# EAGLE board sot23-6 (EAGLE 5.06)
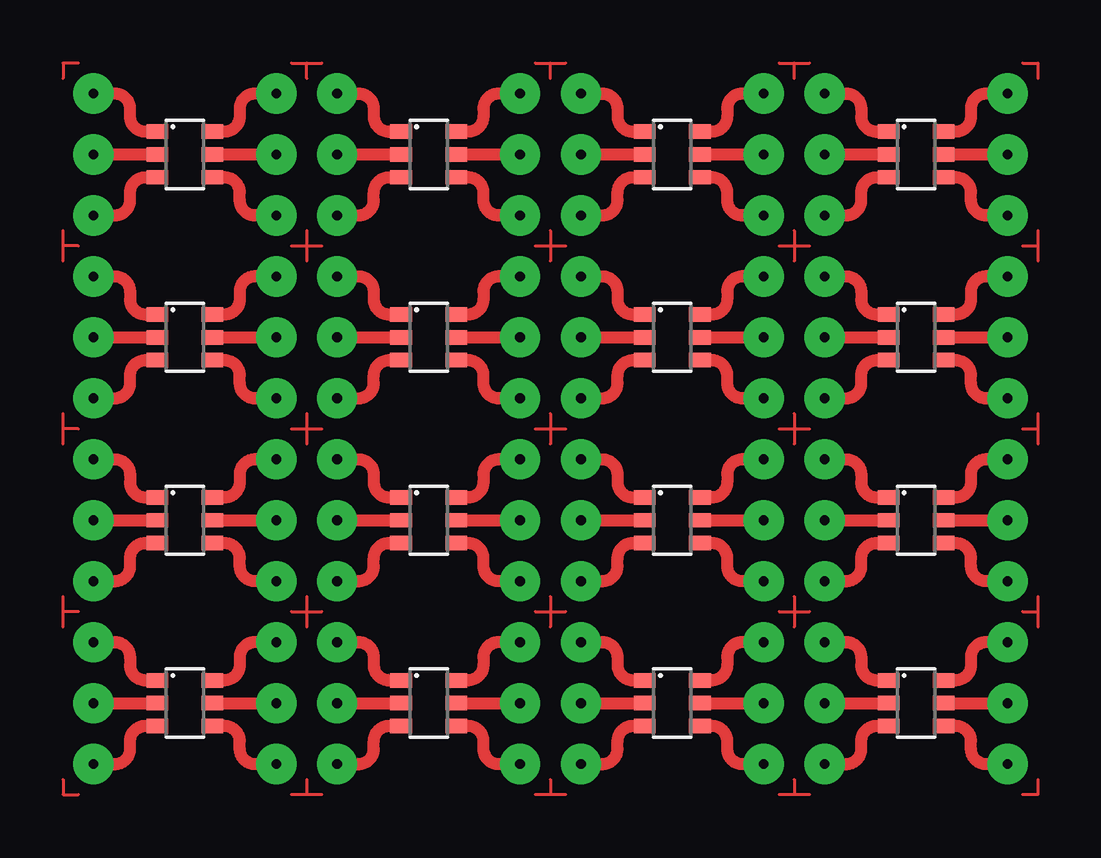
[diagram p0: board, top side]

No outline drawn. Coordinates in mm, seen from the top.
Copper layers (1*16): Top 0.035mm / dielectric 1.5mm / Bottom 0.035mm
Design rules "default": minimum track width 10mil, minimum drill 24mil, track to track 8mil, track to pad 8mil, pad to pad 8mil, via to via 8mil, smd to smd 8mil, copper to edge 40mil, drill to drill 8mil, minimum pad ring 10mil, minimum via ring 8mil, stop-mask expansion 4mil, vias tented up to drill 0mil, thermal gap 10mil

## Footprints (pad centres in the part's own frame; a part is rotated, then mirrored left to right if it is on the bottom)
SOT23-6 = smd 0.6 x 0.9: 1 -0.95,-1.15; 2 0,-1.15; 3 0.95,-1.15; 4 0.95,1.15; 5 0,1.15; 6 -0.95,1.15

## Placement (x,y rotation side)
E$1  [SOT23-6]  0,0 270 top
E$2  [SOT23-6]  10.16,0 270 top
E$3  [SOT23-6]  20.32,0 270 top
E$4  [SOT23-6]  30.48,0 270 top
E$5  [SOT23-6]  0,-7.62 270 top
E$6  [SOT23-6]  10.16,-7.62 270 top
E$7  [SOT23-6]  20.32,-7.62 270 top
E$8  [SOT23-6]  30.48,-7.62 270 top
E$9  [SOT23-6]  0,-15.24 270 top
E$10  [SOT23-6]  10.16,-15.24 270 top
E$11  [SOT23-6]  20.32,-15.24 270 top
E$12  [SOT23-6]  30.48,-15.24 270 top
E$13  [SOT23-6]  0,-22.86 270 top
E$14  [SOT23-6]  10.16,-22.86 270 top
E$15  [SOT23-6]  20.32,-22.86 270 top
E$16  [SOT23-6]  30.48,-22.86 270 top

## Library data of the parts
E$1-E$16 = linear

## Tracks (layer width: path | path; a pad name or v marks a point on that pad's centre or on a via)
S$1  (via drill 0.41 pad 1.68)
  Top 0.508: v-3.81,2.54 -2.92,2.54 arc-90 -2.29,1.91 -2.29,1.59 arc90 -1.65,0.95 -1.27,0.95
S$2  (via drill 0.41 pad 1.68)
  Top 0.508: v-3.81,0 -1.27,0
S$3  (via drill 0.41 pad 1.68)
  Top 0.508: v-3.81,-2.54 -2.92,-2.54 arc90 -2.29,-1.91 -2.29,-1.59 arc-90 -1.65,-0.95 -1.27,-0.95
S$4  (via drill 0.41 pad 1.68)
  Top 0.508: v3.81,-2.54 2.92,-2.54 arc-90 2.29,-1.91 2.29,-1.59 arc90 1.65,-0.95 1.27,-0.95
S$5  (via drill 0.41 pad 1.68)
  Top 0.508: 1.27,0 v3.81,0
S$6  (via drill 0.41 pad 1.68)
  Top 0.508: v3.81,2.54 2.92,2.54 arc90 2.29,1.91 2.29,1.59 arc-90 1.65,0.95 1.27,0.95
S$7  (via drill 0.41 pad 1.68)
  Top 0.508: v6.35,2.54 7.24,2.54 arc-90 7.87,1.91 7.87,1.59 arc90 8.51,0.95 8.89,0.95
S$8  (via drill 0.41 pad 1.68)
  Top 0.508: v6.35,0 8.89,0
S$9  (via drill 0.41 pad 1.68)
  Top 0.508: v6.35,-2.54 7.24,-2.54 arc90 7.87,-1.91 7.87,-1.59 arc-90 8.51,-0.95 8.89,-0.95
S$10  (via drill 0.41 pad 1.68)
  Top 0.508: v13.97,-2.54 13.08,-2.54 arc-90 12.45,-1.91 12.45,-1.59 arc90 11.81,-0.95 11.43,-0.95
S$11  (via drill 0.41 pad 1.68)
  Top 0.508: 11.43,0 v13.97,0
S$12  (via drill 0.41 pad 1.68)
  Top 0.508: v13.97,2.54 13.08,2.54 arc90 12.45,1.91 12.45,1.59 arc-90 11.81,0.95 11.43,0.95
S$13
  Top 0.508: 16.51,2.54 17.4,2.54 arc-90 18.03,1.91 18.03,1.59 arc90 18.67,0.95 19.05,0.95
S$14
  Top 0.508: 16.51,0 19.05,0
S$15
  Top 0.508: 16.51,-2.54 17.4,-2.54 arc90 18.03,-1.91 18.03,-1.59 arc-90 18.67,-0.95 19.05,-0.95
S$16
  Top 0.508: 24.13,-2.54 23.24,-2.54 arc-90 22.61,-1.91 22.61,-1.59 arc90 21.97,-0.95 21.59,-0.95
S$17
  Top 0.508: 21.59,0 24.13,0
S$18
  Top 0.508: 24.13,2.54 23.24,2.54 arc90 22.61,1.91 22.61,1.59 arc-90 21.97,0.95 21.59,0.95
S$19
  Top 0.508: 26.67,2.54 27.56,2.54 arc-90 28.19,1.91 28.19,1.59 arc90 28.83,0.95 29.21,0.95
S$20
  Top 0.508: 26.67,0 29.21,0
S$21
  Top 0.508: 26.67,-2.54 27.56,-2.54 arc90 28.19,-1.91 28.19,-1.59 arc-90 28.83,-0.95 29.21,-0.95
S$22
  Top 0.508: 34.29,-2.54 33.4,-2.54 arc-90 32.77,-1.91 32.77,-1.59 arc90 32.13,-0.95 31.75,-0.95
S$23
  Top 0.508: 31.75,0 34.29,0
S$24
  Top 0.508: 34.29,2.54 33.4,2.54 arc90 32.77,1.91 32.77,1.59 arc-90 32.13,0.95 31.75,0.95
S$25
  Top 0.508: -3.81,-5.08 -2.92,-5.08 arc-90 -2.29,-5.71 -2.29,-6.03 arc90 -1.65,-6.67 -1.27,-6.67
S$26
  Top 0.508: -3.81,-7.62 -1.27,-7.62
S$27
  Top 0.508: -3.81,-10.16 -2.92,-10.16 arc90 -2.29,-9.53 -2.29,-9.21 arc-90 -1.65,-8.57 -1.27,-8.57
S$28
  Top 0.508: 3.81,-10.16 2.92,-10.16 arc-90 2.29,-9.53 2.29,-9.21 arc90 1.65,-8.57 1.27,-8.57
S$29
  Top 0.508: 1.27,-7.62 3.81,-7.62
S$30
  Top 0.508: 3.81,-5.08 2.92,-5.08 arc90 2.29,-5.71 2.29,-6.03 arc-90 1.65,-6.67 1.27,-6.67
S$31
  Top 0.508: 6.35,-5.08 7.24,-5.08 arc-90 7.87,-5.71 7.87,-6.03 arc90 8.51,-6.67 8.89,-6.67
S$32
  Top 0.508: 6.35,-7.62 8.89,-7.62
S$33
  Top 0.508: 6.35,-10.16 7.24,-10.16 arc90 7.87,-9.53 7.87,-9.21 arc-90 8.51,-8.57 8.89,-8.57
S$34
  Top 0.508: 13.97,-10.16 13.08,-10.16 arc-90 12.45,-9.53 12.45,-9.21 arc90 11.81,-8.57 11.43,-8.57
S$35
  Top 0.508: 11.43,-7.62 13.97,-7.62
S$36
  Top 0.508: 13.97,-5.08 13.08,-5.08 arc90 12.45,-5.71 12.45,-6.03 arc-90 11.81,-6.67 11.43,-6.67
S$37
  Top 0.508: 16.51,-5.08 17.4,-5.08 arc-90 18.03,-5.71 18.03,-6.03 arc90 18.67,-6.67 19.05,-6.67
S$38
  Top 0.508: 16.51,-7.62 19.05,-7.62
S$39
  Top 0.508: 16.51,-10.16 17.4,-10.16 arc90 18.03,-9.53 18.03,-9.21 arc-90 18.67,-8.57 19.05,-8.57
S$40
  Top 0.508: 24.13,-10.16 23.24,-10.16 arc-90 22.61,-9.53 22.61,-9.21 arc90 21.97,-8.57 21.59,-8.57
S$41
  Top 0.508: 21.59,-7.62 24.13,-7.62
S$42
  Top 0.508: 24.13,-5.08 23.24,-5.08 arc90 22.61,-5.71 22.61,-6.03 arc-90 21.97,-6.67 21.59,-6.67
S$43
  Top 0.508: 26.67,-5.08 27.56,-5.08 arc-90 28.19,-5.71 28.19,-6.03 arc90 28.83,-6.67 29.21,-6.67
S$44
  Top 0.508: 26.67,-7.62 29.21,-7.62
S$45
  Top 0.508: 26.67,-10.16 27.56,-10.16 arc90 28.19,-9.53 28.19,-9.21 arc-90 28.83,-8.57 29.21,-8.57
S$46
  Top 0.508: 34.29,-10.16 33.4,-10.16 arc-90 32.77,-9.53 32.77,-9.21 arc90 32.13,-8.57 31.75,-8.57
S$47
  Top 0.508: 31.75,-7.62 34.29,-7.62
S$48
  Top 0.508: 34.29,-5.08 33.4,-5.08 arc90 32.77,-5.71 32.77,-6.03 arc-90 32.13,-6.67 31.75,-6.67
S$49
  Top 0.508: -3.81,-12.7 -2.92,-12.7 arc-90 -2.29,-13.34 -2.29,-13.65 arc90 -1.65,-14.29 -1.27,-14.29
S$50
  Top 0.508: -3.81,-15.24 -1.27,-15.24
S$51
  Top 0.508: -3.81,-17.78 -2.92,-17.78 arc90 -2.29,-17.14 -2.29,-16.83 arc-90 -1.65,-16.19 -1.27,-16.19
S$52
  Top 0.508: 3.81,-17.78 2.92,-17.78 arc-90 2.29,-17.14 2.29,-16.83 arc90 1.65,-16.19 1.27,-16.19
S$53
  Top 0.508: 1.27,-15.24 3.81,-15.24
S$54
  Top 0.508: 3.81,-12.7 2.92,-12.7 arc90 2.29,-13.34 2.29,-13.65 arc-90 1.65,-14.29 1.27,-14.29
S$55
  Top 0.508: 6.35,-12.7 7.24,-12.7 arc-90 7.87,-13.34 7.87,-13.65 arc90 8.51,-14.29 8.89,-14.29
S$56
  Top 0.508: 6.35,-15.24 8.89,-15.24
S$57
  Top 0.508: 6.35,-17.78 7.24,-17.78 arc90 7.87,-17.14 7.87,-16.83 arc-90 8.51,-16.19 8.89,-16.19
S$58
  Top 0.508: 13.97,-17.78 13.08,-17.78 arc-90 12.45,-17.14 12.45,-16.83 arc90 11.81,-16.19 11.43,-16.19
S$59
  Top 0.508: 11.43,-15.24 13.97,-15.24
S$60
  Top 0.508: 13.97,-12.7 13.08,-12.7 arc90 12.45,-13.34 12.45,-13.65 arc-90 11.81,-14.29 11.43,-14.29
S$61
  Top 0.508: 16.51,-12.7 17.4,-12.7 arc-90 18.03,-13.34 18.03,-13.65 arc90 18.67,-14.29 19.05,-14.29
S$62
  Top 0.508: 16.51,-15.24 19.05,-15.24
S$63
  Top 0.508: 16.51,-17.78 17.4,-17.78 arc90 18.03,-17.14 18.03,-16.83 arc-90 18.67,-16.19 19.05,-16.19
S$64
  Top 0.508: 24.13,-17.78 23.24,-17.78 arc-90 22.61,-17.14 22.61,-16.83 arc90 21.97,-16.19 21.59,-16.19
S$65
  Top 0.508: 21.59,-15.24 24.13,-15.24
S$66
  Top 0.508: 24.13,-12.7 23.24,-12.7 arc90 22.61,-13.34 22.61,-13.65 arc-90 21.97,-14.29 21.59,-14.29
S$67
  Top 0.508: 26.67,-12.7 27.56,-12.7 arc-90 28.19,-13.34 28.19,-13.65 arc90 28.83,-14.29 29.21,-14.29
S$68
  Top 0.508: 26.67,-15.24 29.21,-15.24
S$69
  Top 0.508: 26.67,-17.78 27.56,-17.78 arc90 28.19,-17.14 28.19,-16.83 arc-90 28.83,-16.19 29.21,-16.19
S$70
  Top 0.508: 34.29,-17.78 33.4,-17.78 arc-90 32.77,-17.14 32.77,-16.83 arc90 32.13,-16.19 31.75,-16.19
S$71
  Top 0.508: 31.75,-15.24 34.29,-15.24
S$72
  Top 0.508: 34.29,-12.7 33.4,-12.7 arc90 32.77,-13.34 32.77,-13.65 arc-90 32.13,-14.29 31.75,-14.29
S$73
  Top 0.508: -3.81,-20.32 -2.92,-20.32 arc-90 -2.29,-20.95 -2.29,-21.27 arc90 -1.65,-21.91 -1.27,-21.91
S$74
  Top 0.508: -3.81,-22.86 -1.27,-22.86
S$75
  Top 0.508: -3.81,-25.4 -2.92,-25.4 arc90 -2.29,-24.77 -2.29,-24.45 arc-90 -1.65,-23.81 -1.27,-23.81
S$76
  Top 0.508: 3.81,-25.4 2.92,-25.4 arc-90 2.29,-24.77 2.29,-24.45 arc90 1.65,-23.81 1.27,-23.81
S$77
  Top 0.508: 1.27,-22.86 3.81,-22.86
S$78
  Top 0.508: 3.81,-20.32 2.92,-20.32 arc90 2.29,-20.95 2.29,-21.27 arc-90 1.65,-21.91 1.27,-21.91
S$79
  Top 0.508: 6.35,-20.32 7.24,-20.32 arc-90 7.87,-20.95 7.87,-21.27 arc90 8.51,-21.91 8.89,-21.91
S$80
  Top 0.508: 6.35,-22.86 8.89,-22.86
S$81
  Top 0.508: 6.35,-25.4 7.24,-25.4 arc90 7.87,-24.77 7.87,-24.45 arc-90 8.51,-23.81 8.89,-23.81
S$82
  Top 0.508: 13.97,-25.4 13.08,-25.4 arc-90 12.45,-24.77 12.45,-24.45 arc90 11.81,-23.81 11.43,-23.81
S$83
  Top 0.508: 11.43,-22.86 13.97,-22.86
S$84
  Top 0.508: 13.97,-20.32 13.08,-20.32 arc90 12.45,-20.95 12.45,-21.27 arc-90 11.81,-21.91 11.43,-21.91
S$85
  Top 0.508: 16.51,-20.32 17.4,-20.32 arc-90 18.03,-20.95 18.03,-21.27 arc90 18.67,-21.91 19.05,-21.91
S$86
  Top 0.508: 16.51,-22.86 19.05,-22.86
S$87
  Top 0.508: 16.51,-25.4 17.4,-25.4 arc90 18.03,-24.77 18.03,-24.45 arc-90 18.67,-23.81 19.05,-23.81
S$88
  Top 0.508: 24.13,-25.4 23.24,-25.4 arc-90 22.61,-24.77 22.61,-24.45 arc90 21.97,-23.81 21.59,-23.81
S$89
  Top 0.508: 21.59,-22.86 24.13,-22.86
S$90
  Top 0.508: 24.13,-20.32 23.24,-20.32 arc90 22.61,-20.95 22.61,-21.27 arc-90 21.97,-21.91 21.59,-21.91
S$91
  Top 0.508: 26.67,-20.32 27.56,-20.32 arc-90 28.19,-20.95 28.19,-21.27 arc90 28.83,-21.91 29.21,-21.91
S$92
  Top 0.508: 26.67,-22.86 29.21,-22.86
S$93
  Top 0.508: 26.67,-25.4 27.56,-25.4 arc90 28.19,-24.77 28.19,-24.45 arc-90 28.83,-23.81 29.21,-23.81
S$94
  Top 0.508: 34.29,-25.4 33.4,-25.4 arc-90 32.77,-24.77 32.77,-24.45 arc90 32.13,-23.81 31.75,-23.81
S$95
  Top 0.508: 31.75,-22.86 34.29,-22.86
S$96
  Top 0.508: 34.29,-20.32 33.4,-20.32 arc90 32.77,-20.95 32.77,-21.27 arc-90 32.13,-21.91 31.75,-21.91
S$97
  Top 0.127: 4.45,3.81 5.08,3.81 | 5.08,3.81 5.71,3.81 | 5.08,3.17 5.08,3.81
S$98
  Top 0.127: 14.61,3.81 15.24,3.81 | 15.24,3.81 15.88,3.81 | 15.24,3.17 15.24,3.81
S$99
  Top 0.127: 24.77,3.81 25.4,3.81 | 25.4,3.81 26.04,3.81 | 25.4,3.17 25.4,3.81
S$100
  Top 0.127: 26.04,-26.67 25.4,-26.67 | 25.4,-26.67 24.77,-26.67 | 25.4,-26.04 25.4,-26.67
S$101
  Top 0.127: 15.88,-26.67 15.24,-26.67 | 15.24,-26.67 14.61,-26.67 | 15.24,-26.04 15.24,-26.67
S$102
  Top 0.127: 5.71,-26.67 5.08,-26.67 | 5.08,-26.67 4.45,-26.67 | 5.08,-26.04 5.08,-26.67
S$103
  Top 0.127: -5.08,-19.68 -5.08,-19.05 | -5.08,-19.05 -5.08,-18.41 | -4.45,-19.05 -5.08,-19.05
S$104
  Top 0.127: -5.08,-12.06 -5.08,-11.43 | -5.08,-11.43 -5.08,-10.79 | -4.45,-11.43 -5.08,-11.43
S$105
  Top 0.127: -5.08,-4.45 -5.08,-3.81 | -5.08,-3.81 -5.08,-3.17 | -4.45,-3.81 -5.08,-3.81
S$106
  Top 0.127: 35.56,-3.17 35.56,-3.81 | 35.56,-3.81 35.56,-4.45 | 34.92,-3.81 35.56,-3.81
S$107
  Top 0.127: 35.56,-10.79 35.56,-11.43 | 35.56,-11.43 35.56,-12.06 | 34.92,-11.43 35.56,-11.43
S$108
  Top 0.127: 35.56,-18.41 35.56,-19.05 | 35.56,-19.05 35.56,-19.68 | 34.92,-19.05 35.56,-19.05
S$109
  Top 0.127: -4.45,3.81 -5.08,3.81 -5.08,3.17
S$110
  Top 0.127: 34.92,3.81 35.56,3.81 35.56,3.17
S$111
  Top 0.127: 35.56,-26.04 35.56,-26.67 34.92,-26.67
S$112
  Top 0.127: -5.08,-26.04 -5.08,-26.67 -4.45,-26.67
S$113
  Top 0.127: 5.08,-18.41 5.08,-19.68
S$114
  Top 0.127: 4.45,-19.05 5.71,-19.05
S$115
  Top 0.127: 14.61,-19.05 15.88,-19.05
S$116
  Top 0.127: 15.24,-18.41 15.24,-19.68
S$117
  Top 0.127: 24.77,-19.05 26.04,-19.05
S$118
  Top 0.127: 25.4,-18.41 25.4,-19.68
S$119
  Top 0.127: 5.08,-10.79 5.08,-12.06
S$120
  Top 0.127: 4.45,-11.43 5.71,-11.43
S$121
  Top 0.127: 14.61,-11.43 15.88,-11.43
S$122
  Top 0.127: 15.24,-10.79 15.24,-12.06
S$123
  Top 0.127: 24.77,-11.43 26.04,-11.43
S$124
  Top 0.127: 25.4,-10.79 25.4,-12.06
S$125
  Top 0.127: 5.08,-3.17 5.08,-4.45
S$126
  Top 0.127: 4.45,-3.81 5.71,-3.81
S$127
  Top 0.127: 14.61,-3.81 15.88,-3.81
S$128
  Top 0.127: 15.24,-3.17 15.24,-4.45
S$129
  Top 0.127: 24.77,-3.81 26.04,-3.81
S$130
  Top 0.127: 25.4,-3.17 25.4,-4.45
S$132  (via drill 0.41 pad 1.68)
  other vias: 16.51,2.54
S$133  (via drill 0.41 pad 1.68)
  other vias: 16.51,0
S$134  (via drill 0.41 pad 1.68)
  other vias: 16.51,-2.54
S$135  (via drill 0.41 pad 1.68)
  other vias: 24.13,-2.54
S$136  (via drill 0.41 pad 1.68)
  other vias: 24.13,0
S$137  (via drill 0.41 pad 1.68)
  other vias: 24.13,2.54
S$138  (via drill 0.41 pad 1.68)
  other vias: 26.67,2.54
S$139  (via drill 0.41 pad 1.68)
  other vias: 26.67,0
S$140  (via drill 0.41 pad 1.68)
  other vias: 26.67,-2.54
S$141  (via drill 0.41 pad 1.68)
  other vias: 34.29,-2.54
S$142  (via drill 0.41 pad 1.68)
  other vias: 34.29,0
S$143  (via drill 0.41 pad 1.68)
  other vias: 34.29,2.54
S$144  (via drill 0.41 pad 1.68)
  other vias: -3.81,-5.08
S$145  (via drill 0.41 pad 1.68)
  other vias: -3.81,-7.62
S$146  (via drill 0.41 pad 1.68)
  other vias: -3.81,-10.16
S$147  (via drill 0.41 pad 1.68)
  other vias: 3.81,-10.16
S$148  (via drill 0.41 pad 1.68)
  other vias: 3.81,-7.62
S$149  (via drill 0.41 pad 1.68)
  other vias: 3.81,-5.08
S$150  (via drill 0.41 pad 1.68)
  other vias: 6.35,-5.08
S$151  (via drill 0.41 pad 1.68)
  other vias: 6.35,-7.62
S$152  (via drill 0.41 pad 1.68)
  other vias: 6.35,-10.16
S$153  (via drill 0.41 pad 1.68)
  other vias: 13.97,-10.16
S$154  (via drill 0.41 pad 1.68)
  other vias: 13.97,-7.62
S$155  (via drill 0.41 pad 1.68)
  other vias: 13.97,-5.08
S$156  (via drill 0.41 pad 1.68)
  other vias: 16.51,-5.08
S$157  (via drill 0.41 pad 1.68)
  other vias: 16.51,-7.62
S$158  (via drill 0.41 pad 1.68)
  other vias: 16.51,-10.16
S$159  (via drill 0.41 pad 1.68)
  other vias: 24.13,-10.16
S$160  (via drill 0.41 pad 1.68)
  other vias: 24.13,-7.62
S$161  (via drill 0.41 pad 1.68)
  other vias: 24.13,-5.08
S$162  (via drill 0.41 pad 1.68)
  other vias: 26.67,-5.08
S$163  (via drill 0.41 pad 1.68)
  other vias: 26.67,-7.62
S$164  (via drill 0.41 pad 1.68)
  other vias: 26.67,-10.16
S$165  (via drill 0.41 pad 1.68)
  other vias: 34.29,-10.16
S$166  (via drill 0.41 pad 1.68)
  other vias: 34.29,-7.62
S$167  (via drill 0.41 pad 1.68)
  other vias: 34.29,-5.08
S$168  (via drill 0.41 pad 1.68)
  other vias: -3.81,-12.7
S$169  (via drill 0.41 pad 1.68)
  other vias: -3.81,-15.24
S$170  (via drill 0.41 pad 1.68)
  other vias: -3.81,-17.78
S$171  (via drill 0.41 pad 1.68)
  other vias: 3.81,-17.78
S$172  (via drill 0.41 pad 1.68)
  other vias: 3.81,-15.24
S$173  (via drill 0.41 pad 1.68)
  other vias: 3.81,-12.7
S$174  (via drill 0.41 pad 1.68)
  other vias: 6.35,-12.7
S$175  (via drill 0.41 pad 1.68)
  other vias: 6.35,-15.24
S$176  (via drill 0.41 pad 1.68)
  other vias: 6.35,-17.78
S$177  (via drill 0.41 pad 1.68)
  other vias: 13.97,-17.78
S$178  (via drill 0.41 pad 1.68)
  other vias: 13.97,-15.24
S$179  (via drill 0.41 pad 1.68)
  other vias: 13.97,-12.7
S$180  (via drill 0.41 pad 1.68)
  other vias: 16.51,-12.7
S$181  (via drill 0.41 pad 1.68)
  other vias: 16.51,-15.24
S$182  (via drill 0.41 pad 1.68)
  other vias: 16.51,-17.78
S$183  (via drill 0.41 pad 1.68)
  other vias: 24.13,-17.78
S$184  (via drill 0.41 pad 1.68)
  other vias: 24.13,-15.24
S$185  (via drill 0.41 pad 1.68)
  other vias: 24.13,-12.7
S$186  (via drill 0.41 pad 1.68)
  other vias: 26.67,-12.7
S$187  (via drill 0.41 pad 1.68)
  other vias: 26.67,-15.24
S$188  (via drill 0.41 pad 1.68)
  other vias: 26.67,-17.78
S$189  (via drill 0.41 pad 1.68)
  other vias: 34.29,-17.78
S$190  (via drill 0.41 pad 1.68)
  other vias: 34.29,-15.24
S$191  (via drill 0.41 pad 1.68)
  other vias: 34.29,-12.7
S$192  (via drill 0.41 pad 1.68)
  other vias: -3.81,-20.32
S$193  (via drill 0.41 pad 1.68)
  other vias: -3.81,-22.86
S$194  (via drill 0.41 pad 1.68)
  other vias: -3.81,-25.4
S$195  (via drill 0.41 pad 1.68)
  other vias: 3.81,-25.4
S$196  (via drill 0.41 pad 1.68)
  other vias: 3.81,-22.86
S$197  (via drill 0.41 pad 1.68)
  other vias: 3.81,-20.32
S$198  (via drill 0.41 pad 1.68)
  other vias: 6.35,-20.32
S$199  (via drill 0.41 pad 1.68)
  other vias: 6.35,-22.86
S$200  (via drill 0.41 pad 1.68)
  other vias: 6.35,-25.4
S$201  (via drill 0.41 pad 1.68)
  other vias: 13.97,-25.4
S$202  (via drill 0.41 pad 1.68)
  other vias: 13.97,-22.86
S$203  (via drill 0.41 pad 1.68)
  other vias: 13.97,-20.32
S$204  (via drill 0.41 pad 1.68)
  other vias: 16.51,-20.32
S$205  (via drill 0.41 pad 1.68)
  other vias: 16.51,-22.86
S$206  (via drill 0.41 pad 1.68)
  other vias: 16.51,-25.4
S$207  (via drill 0.41 pad 1.68)
  other vias: 24.13,-25.4
S$208  (via drill 0.41 pad 1.68)
  other vias: 24.13,-22.86
S$209  (via drill 0.41 pad 1.68)
  other vias: 24.13,-20.32
S$210  (via drill 0.41 pad 1.68)
  other vias: 26.67,-20.32
S$211  (via drill 0.41 pad 1.68)
  other vias: 26.67,-22.86
S$212  (via drill 0.41 pad 1.68)
  other vias: 26.67,-25.4
S$213  (via drill 0.41 pad 1.68)
  other vias: 34.29,-25.4
S$214  (via drill 0.41 pad 1.68)
  other vias: 34.29,-22.86
S$215  (via drill 0.41 pad 1.68)
  other vias: 34.29,-20.32